# EAGLE board ICS40300-preamp-surfacemount_Rev-C (EAGLE 8.2.2)
REV: B
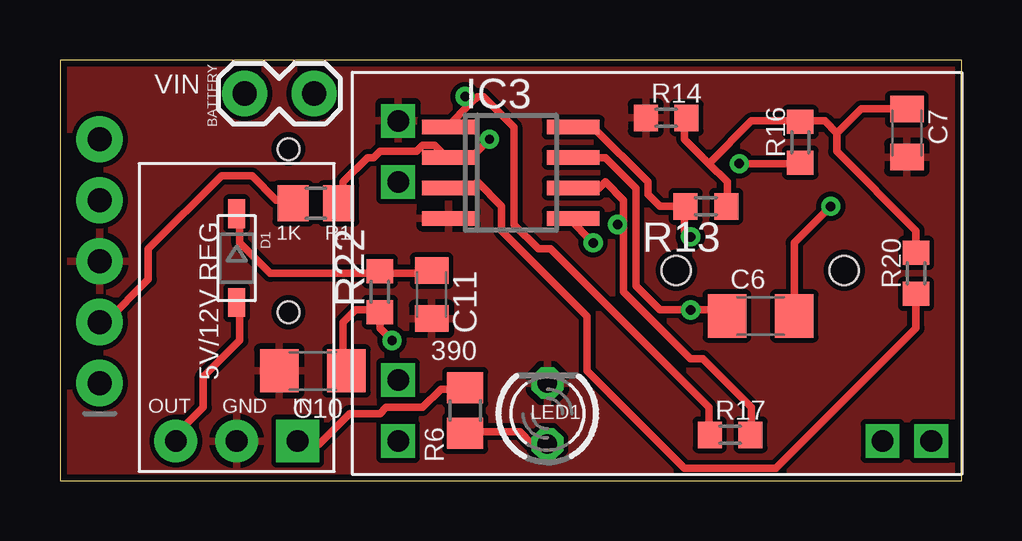
[diagram p0: board, top side]
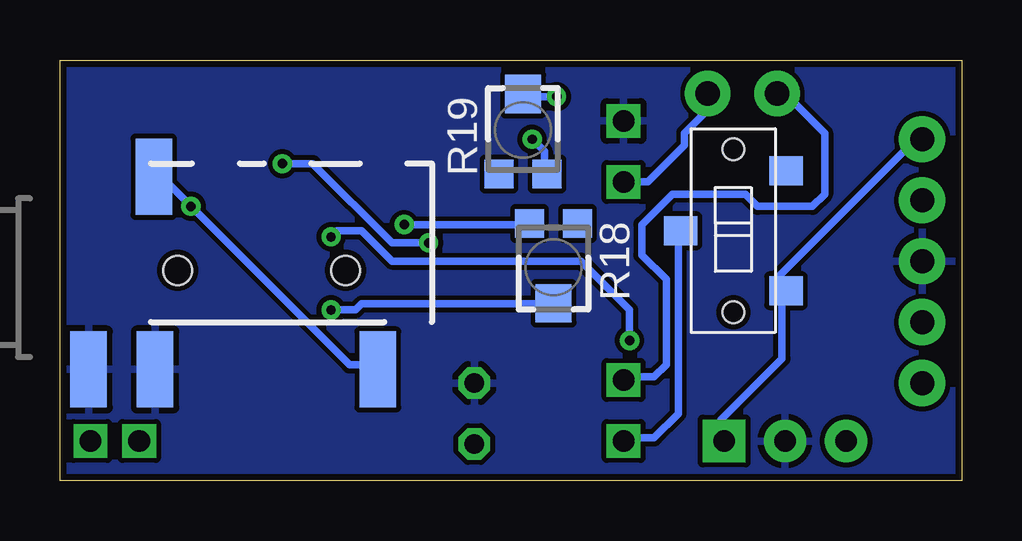
[diagram p1: board, bottom side, seen from below]

Size 37.59 x 17.53 mm. Coordinates in mm from the lower left corner, seen from the top.
Outline: 0,0 37.59,0 37.59,17.53 0,17.53 0,0
Copper layers (1*16): Top 0.035mm / dielectric 1.5mm / Bottom 0.035mm
Design rules "adafruit *": minimum track width 12mil, minimum drill 15.5mil, track to track 8mil, track to pad 8mil, pad to pad 8mil, via to via 8mil, smd to smd 8mil, copper to edge 10mil, drill to drill 8mil, minimum pad ring 10mil, minimum via ring 8mil, stop-mask expansion 2mil, vias tented up to drill 20mil, thermal gap 10mil

## Footprints (pad centres in the part's own frame; a part is rotated, then mirrored left to right if it is on the bottom)
1X02_LOCK = drill 1.016 pad 1.88: 1 -0.178,0; 2 2.718,0
C3216 = smd 1.6 x 1.8: 1 -1.4,0; 2 1.4,0
C0805K = smd 1.1 x 1.4: 1 -1,0; 2 1,0
SOD-123 = smd 1.2 x 0.7: A 1.85,0; C -1.85,0
SO08 = smd 0.6 x 2.2: 1 -1.905,-2.6; 2 -0.635,-2.6; 3 0.635,-2.6; 4 1.905,-2.6; 5 1.905,2.6; 6 0.635,2.6; 7 -0.635,2.6; 8 -1.905,2.6
POLOLU_5V-12V_STEPUP_U3V12F5-U3V12F12 = drill 0.9 pad 1.778: GND 0,-6.35; VOUT -2.54,-6.35 | drill 0.9 pad 1.778 square: VIN 2.54,-6.35
1X05_ROUND_76 = drill 1 pad 1.93: 1 -5.08,0; 2 -2.54,0; 3 0,0; 4 2.54,0; 5 5.08,0
LED3MM = drill 0.813 octagon: A -1.27,0; K 1.27,0
AUDIO-JACK-TRRS-SMD = smd 1.524 x 3.175: EARTH -2.114,-5.271; RING1 0.612,2.759; RING2 0.66,-5.271; TIP 9.948,-5.271 | hole 1.2: 1.6,-1.15; 8.6,-1.15
SWITCH_SPDT_CL-SB-12B = smd 1.2 x 1.4: P$1 -2.5,-2.2; P$2 0,2.2; P$3 2.5,-2.2 | hole 0.9: -3.4,0; 3.4,0
R0805 = smd 1.3 x 1.5: 1 -0.95,0; 2 0.95,0
R0603 = smd 1 x 1.1: 1 -0.85,0; 2 0.85,0
TC33X = smd 1.2 x 1.2: 1 -1,-1.825; 3 1,-1.825 | smd 1.5 x 1.6: 2 0,1.5
TP4056-LITHIUM-PROTECTED-MODULE-MOVED-PAD = drill 0.9 square: B+ 10.795,4.445; B- 10.795,-3.81; IN+ -11.43,6.985; IN- -9.398,6.985; OUT+ 10.795,6.985; OUT- 10.795,-6.35

## Placement (x,y rotation side)
BATTERY  [1X02_LOCK]  7.87,16.13 0 top
C6  150uF  [C3216]  29.21,6.86 0 top
C7  10uF  [C0805K]  35.31,14.48 270 top
C10  150uF  [C3216]  10.54,4.57 180 top
C11  10uF  [C0805K]  15.49,7.75 270 top
D1  1N4148  [SOD-123]  7.37,9.27 270 top
IC3  OPA2134UA  [SO08]  18.8,12.83 270 top
J_REG_12V  POLOLU_VOLTAGE_REGULATORS_3PIN  [POLOLU_5V-12V_STEPUP_U3V12F5-U3V12F12]  7.37,8 0 top
JP1  [1X05_ROUND_76]  1.65,9.14 90 top
LED1  [LED3MM]  20.32,2.79 90 top
PHONES  AUDIO-JACK3LGPADS  [AUDIO-JACK-TRRS-SMD]  34.29,9.91 0 bottom
POWER  SPDT  [SWITCH_SPDT_CL-SB-12B]  9.52,10.41 90 bottom
R1  1K  [R0805]  10.67,11.56 0 top
R6  390  [R0805]  16.89,2.92 90 top
R13  100K  [R0603]  26.92,11.43 180 top
R14  150K  [R0603]  25.27,15.11 0 top
R16  1K  [R0603]  30.86,14.1 90 top
R17  1K  [R0603]  27.94,1.91 0 top
R18  20K  [TC33X]  17.02,8.89 180 bottom
R19  20K  [TC33X]  18.29,14.61 0 bottom
R20  1K  [R0603]  35.69,8.64 90 top
R22  10  [R0603]  13.34,7.87 90 top
U$1  TP4056-MODULETP4056  [TP4056-LITHIUM-PROTECTED-MODULE-MOVED-PAD]  24.89,8.64 180 top

## Library data of the parts
BATTERY J_REG_12V POWER R1 R6 R13 R14 R16 R17 R20 R22 U$1 = CMU-ArtFab
C6 C7 C10 C11 R18 R19 = adafruit
D1 = adafruit; DIGIKEY: 1N4148WTPMSCT-ND
IC3 = linear
JP1 = microbuilder
LED1 = led
PHONES = Daniel

## Nets
+12V: D1.A J_REG_12V.VOUT
GND: C7.2 C10.2 C11.2 IC3.4 J_REG_12V.GND JP1.3 LED1.K PHONES.EARTH PHONES.RING2 R14.1 U$1.OUT-
IN+: U$1.IN+
IN-: U$1.IN-
N$1: JP1.2 R1.1
N$3: POWER.P$2 U$1.OUT+
N$5: BATTERY.1 U$1.B+
N$6: BATTERY.2 U$1.B-
N$13: IC3.5 R16.1
N$14: C6.1 IC3.7 R18.2
N$15: IC3.6 R17.2 R18.3
N$16: LED1.A R6.1
N$17: C7.1 R13.1 R14.2 R16.2 R20.2
N$18: IC3.3 R20.1
N$19: IC3.1 R17.1 R19.2
N$21: IC3.2 R1.2 R19.3
N$25: C6.2 PHONES.RING1 PHONES.TIP
N$28: C11.1 D1.C R22.2
N$32: C10.1 IC3.8 R13.2 R22.1
VIN: J_REG_12V.VIN JP1.5 POWER.P$1 R6.2

## Tracks (layer width: path | path; a pad name or v marks a point on that pad's centre or on a via)
+12V
  Top 0.305: D1.A 7.49,7.37 7.49,5.84 5.97,4.32 5.97,3.05 4.7,1.78 J_REG_12V.VOUT
GND
  pour Top: 37.97,-0.76 37.97,19.05 -0.25,19.05 -0.25,-0.76
  pour Bottom: -0.25,-0.76 37.97,-0.76 37.97,19.81 -0.25,19.81
N$1
  Top 0.305: JP1.2 1.9,6.6 3.68,8.38 3.68,9.65 6.73,12.7 8,12.7 9.02,11.68 9.52,11.68 R1.1
N$3
  Bottom 0.305: POWER.P$2 11.81,10.41 11.81,2.79 12.83,1.78 14.1,1.78 U$1.OUT+
N$5
  Bottom 0.305: U$1.B+ 14.1,4.32 12.83,4.32 12.32,4.83 12.32,8.38 13.34,9.4 13.34,10.67 12.07,11.94 9.02,11.94 8.51,11.43 6.22,11.43 5.71,11.94 5.71,14.48 7.49,16.26 BATTERY.1
N$6
  Bottom 0.305: U$1.B- 13.08,12.45 11.56,13.97 11.56,14.48 10.79,15.24 10.79,16 BATTERY.2
N$13  (via drill 0.39)
  Top 0.305: v28.32,13.21 30.86,13.21 R16.1 | v22.23,9.91 21.21,10.92 IC3.5
  Bottom 0.305: v28.32,13.21 27.05,13.21 23.75,9.91 v22.23,9.91
N$14  (via drill 0.39)
  Top 0.305: C6.1 27.56,6.86 27.3,7.11 v26.29,7.11 25.02,7.11 24,8.13 24,12.19 22.73,13.46 IC3.7
  Bottom 0.305: v26.29,7.11 25.27,7.11 25.02,7.37 17.14,7.37 R18.2
N$15  (via drill 0.39)
  Top 0.305: 23.5,10.67 23.5,11.68 22.73,12.45 22.48,12.19 IC3.6 | 23.5,10.67 23.5,7.87 26.29,5.08 26.8,5.08 28.83,3.05 28.83,2.03 R17.2 | 23.5,10.67 v23.24,10.67
  Bottom 0.305: v23.24,10.67 18.16,10.67 R18.3
N$16
  Top 0.305: LED1.A 19.69,1.52 19.18,2.03 16.89,2.03 R6.1
N$17
  Top 0.305: 27.05,13.21 26.04,14.22 26.04,14.99 R14.2 | 27.05,13.21 27.81,12.45 27.81,11.43 R13.1 | R20.2 35.69,10.41 32.38,13.72 32.38,14.48 | 32.38,14.48 31.88,14.99 30.86,14.99 | 32.38,14.48 33.4,15.49 35.18,15.49 C7.1 | 27.05,13.21 28.83,14.99 30.86,14.99 | 30.86,14.99 R16.2
N$18
  Top 0.305: R20.1 35.69,6.35 29.85,0.51 26.04,0.51 21.97,4.57 21.97,6.86 18.41,10.41 18.41,11.43 17.4,12.45 17.14,12.19 IC3.3
N$19  (via drill 0.39)
  Top 0.305: 17.14,15.75 16.13,14.73 IC3.1 | 17.14,15.75 17.4,16 17.65,16 18.92,14.73 18.92,10.67 19.94,9.65 20.45,9.65 27.05,3.05 27.05,2.03 R17.1 | 17.14,15.75 v16.89,16
  Bottom 0.305: v16.89,16 18.16,16 R19.2
N$21  (via drill 0.39)
  Top 0.305: v17.91,14.22 17.14,13.46 IC3.2 16.13,13.46 15.62,13.97 15.11,13.97 14.86,13.72 13.34,13.72 13.08,13.46 12.83,13.46 11.81,12.45 11.81,11.68 R1.2
  Bottom 0.305: v17.91,14.22 17.4,13.72 17.4,12.95 R19.3
N$25  (via drill 0.39)
  Top 0.305: v32.13,11.43 30.61,9.91 C6.2
  Bottom 0.305: PHONES.RING1 33.66,12.45 33.15,12.45 v32.13,11.43 25.53,4.83 24.51,4.83 PHONES.TIP
N$28
  Top 0.305: 13.34,8.64 15.37,8.64 C11.1 | 13.34,8.64 8.76,8.64 7.49,9.91 7.49,10.92 D1.C | 13.34,8.64 R22.2
N$32  (via drill 0.39)
  Top 0.305: C10.1 11.81,4.57 11.81,6.6 12.32,7.11 13.34,7.11 R22.1 13.34,6.35 v13.84,5.84 | 26.04,11.43 25.02,11.43 24.51,11.94 24.51,12.45 22.23,14.73 IC3.8 | v26.29,10.16 26.04,10.41 26.04,11.43 | 26.04,11.43 R13.2
  Bottom 0.305: v13.84,5.84 13.84,7.11 15.88,9.14 23.75,9.14 25.02,10.41 26.04,10.41 v26.29,10.16
VIN
  Top 0.305: R6.2 16.89,3.81 15.88,3.81 15.11,3.05 13.59,3.05 13.34,2.79 12.07,2.79 10.79,1.52 10.03,1.52 J_REG_12V.VIN
  Bottom 0.305: 7.49,7.87 7.49,5.08 10.03,2.54 10.03,1.78 J_REG_12V.VIN | JP1.5 2.16,13.72 2.41,13.72 7.75,8.38 7.75,8.13 7.49,7.87 | 7.49,7.87 POWER.P$1

## Text on the board
tNames: VIN